# Altium PCB HAB_V01R01.PcbDoc (part 1 of 3)
Units mil, origin at the board's own origin, x right, y up, seen from the top; angles counter-clockwise.
Board outline 3149.61 x 1574.8 mil, 4 copper layers ([L1] Top Layer, [L2] GND, [L3] PWR, [L4] Bottom Layer), stack 61.811 mil thick; 74 components, 79 nets, 377 pads, 164 vias.
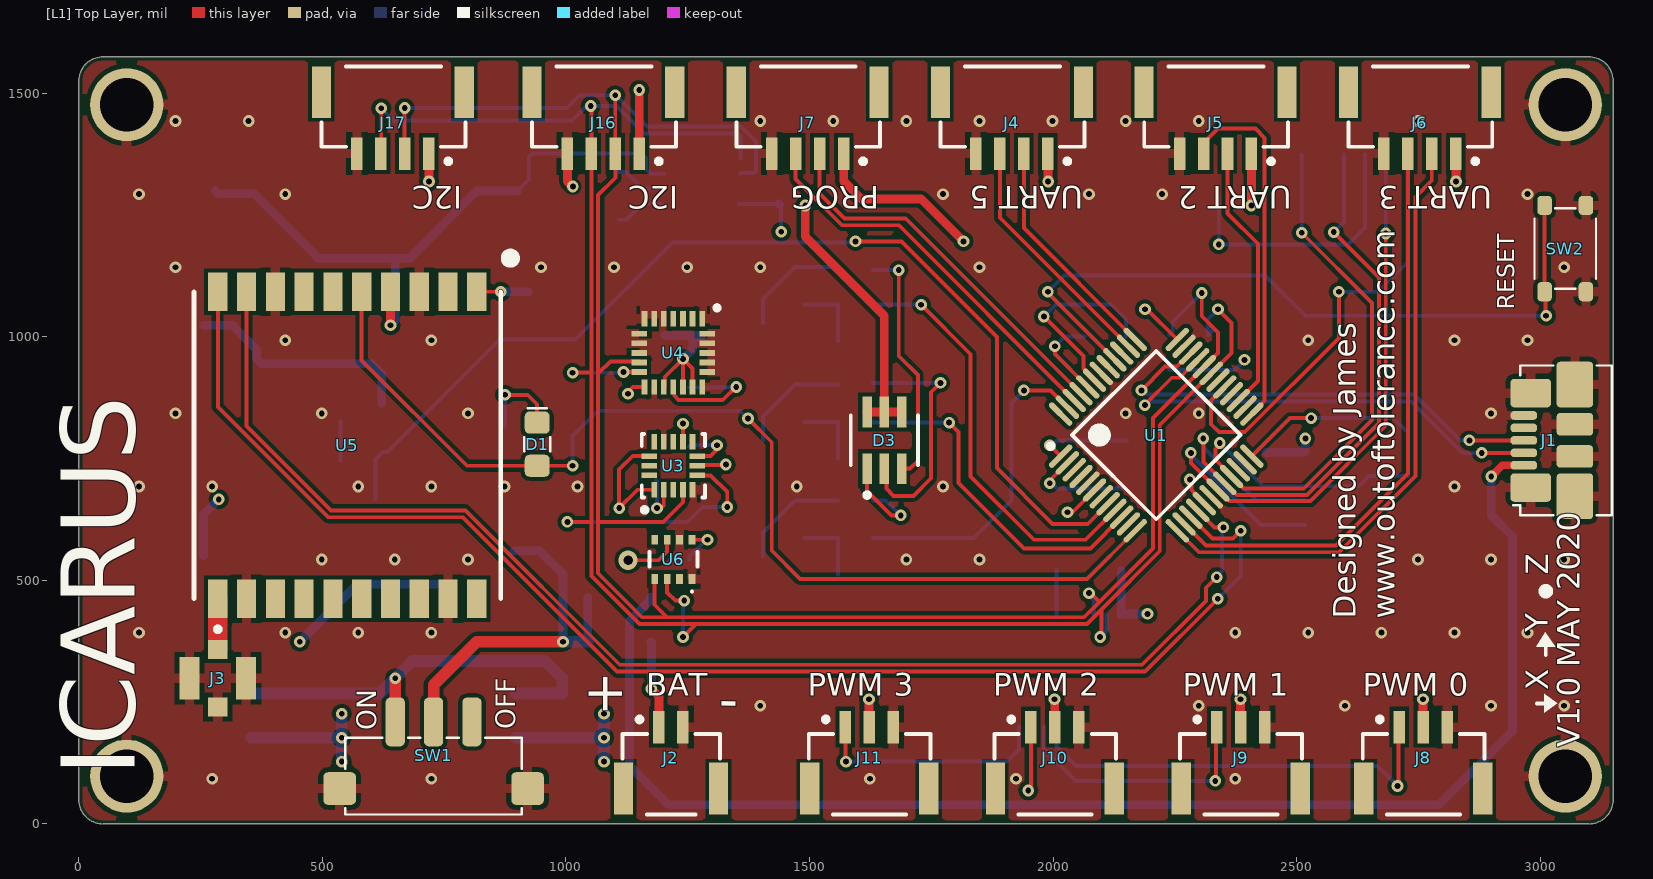
[diagram p0: [L1] Top Layer view]
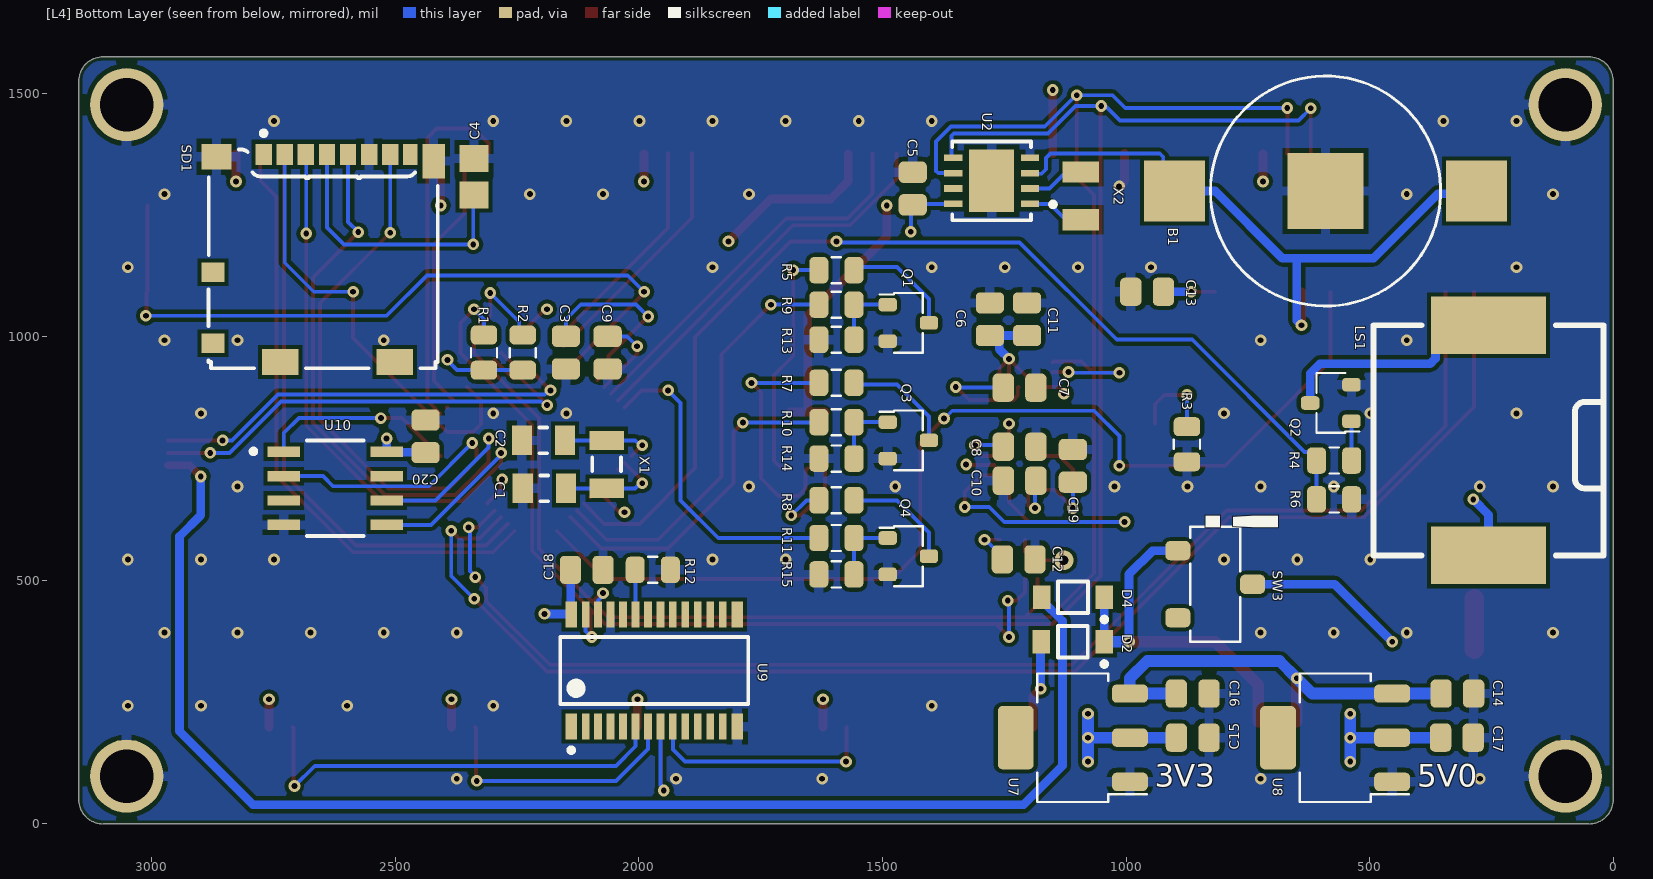
[diagram p1: [L4] Bottom Layer view, seen from below]
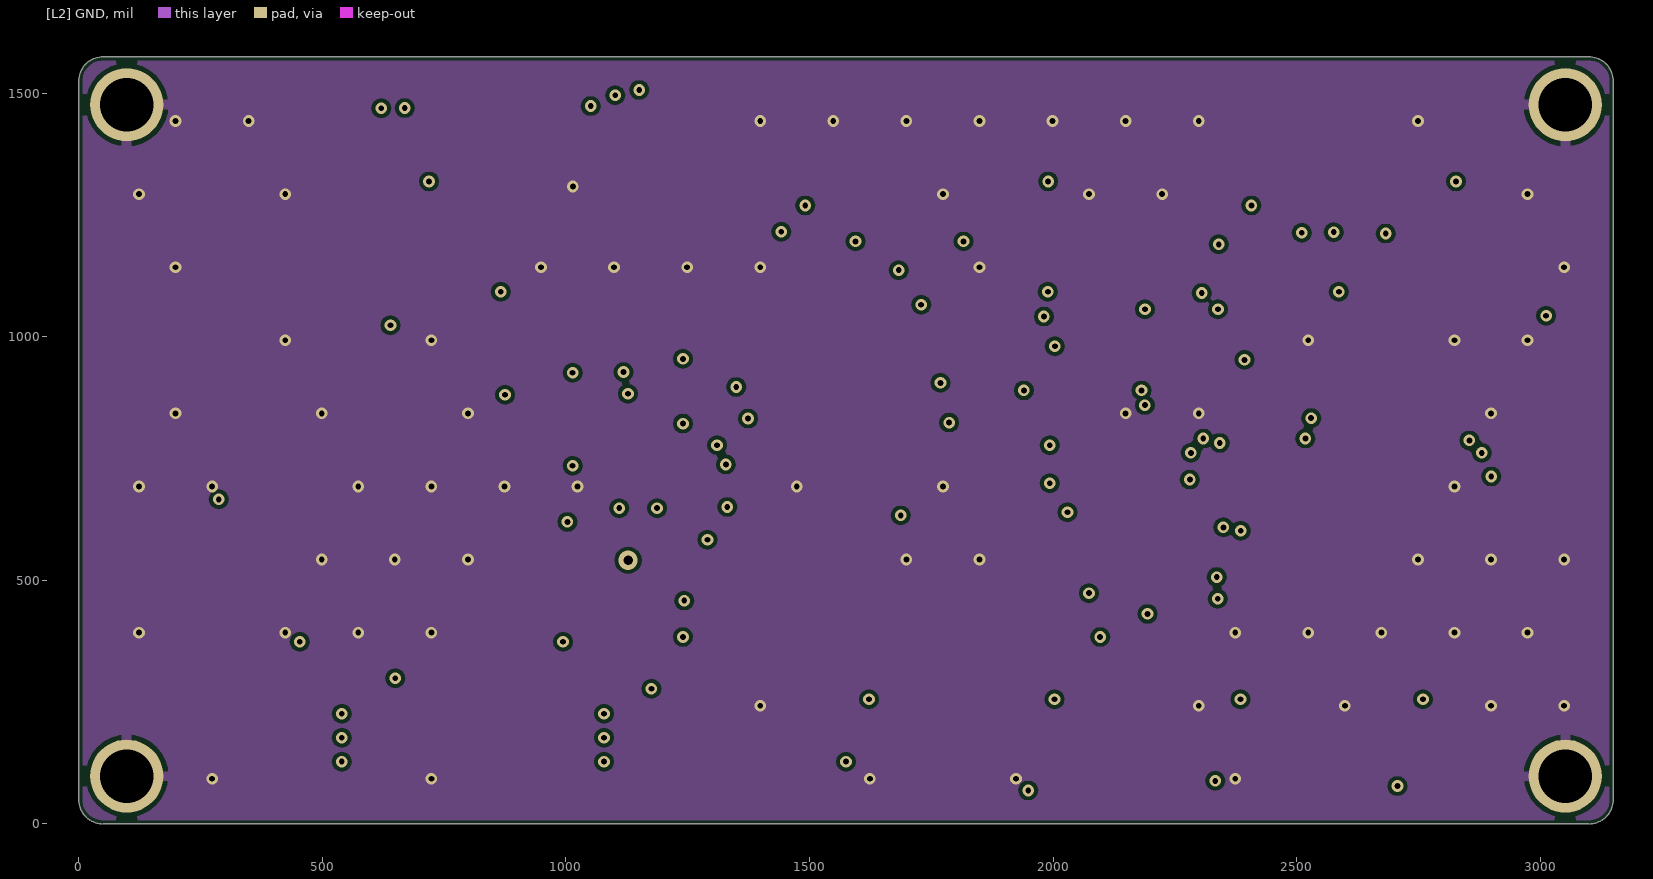
[diagram p2: [L2] GND]
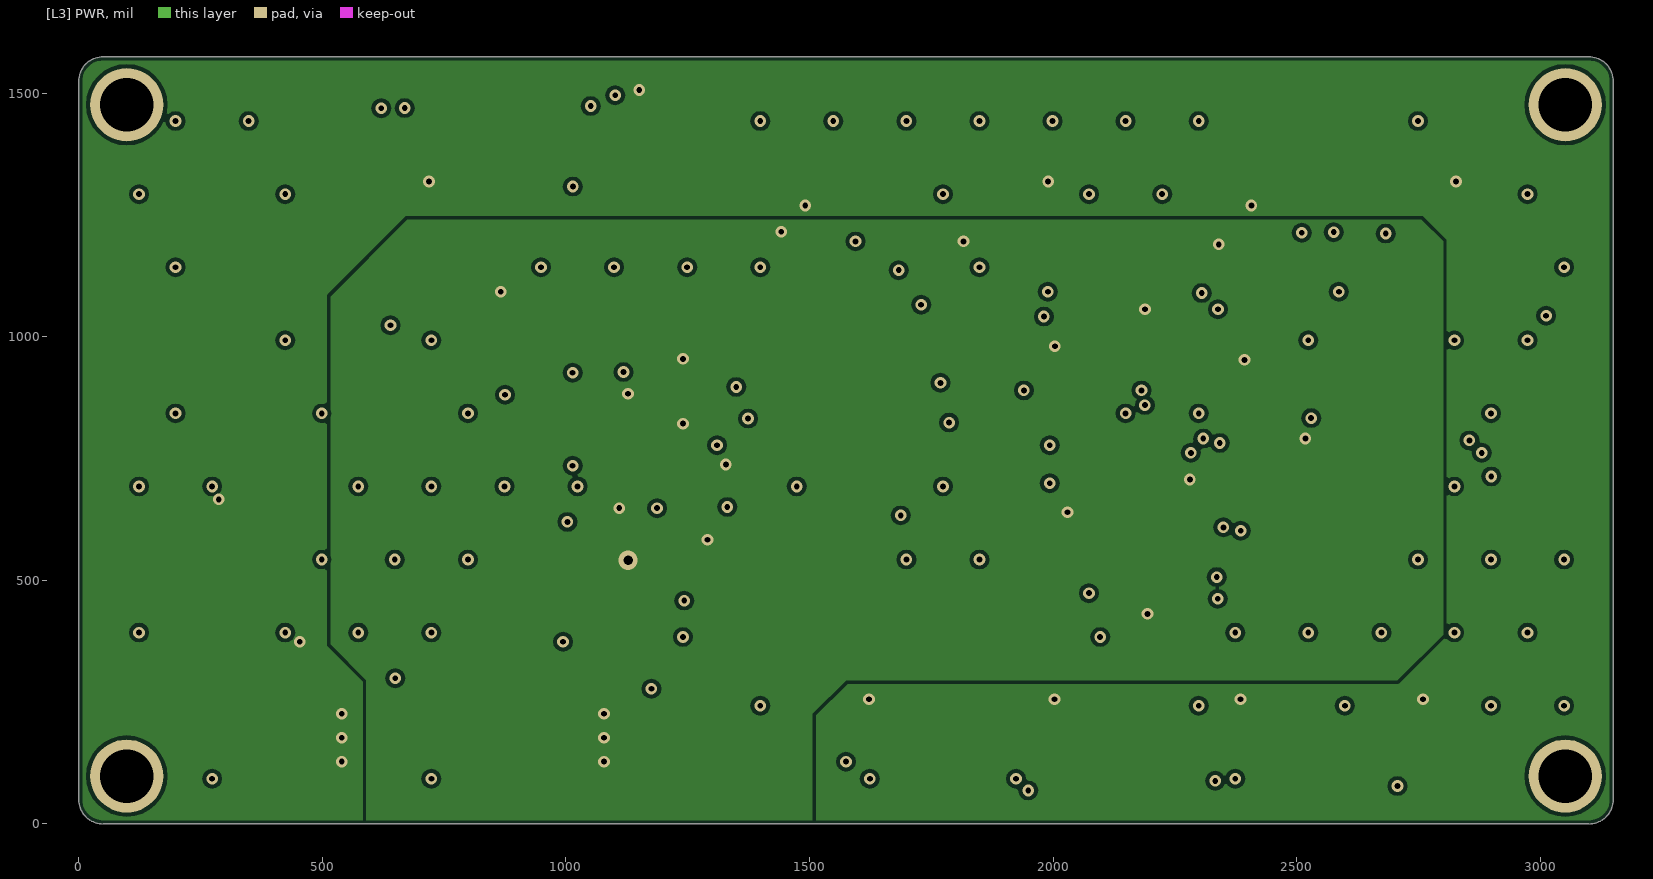
[diagram p3: [L3] PWR]
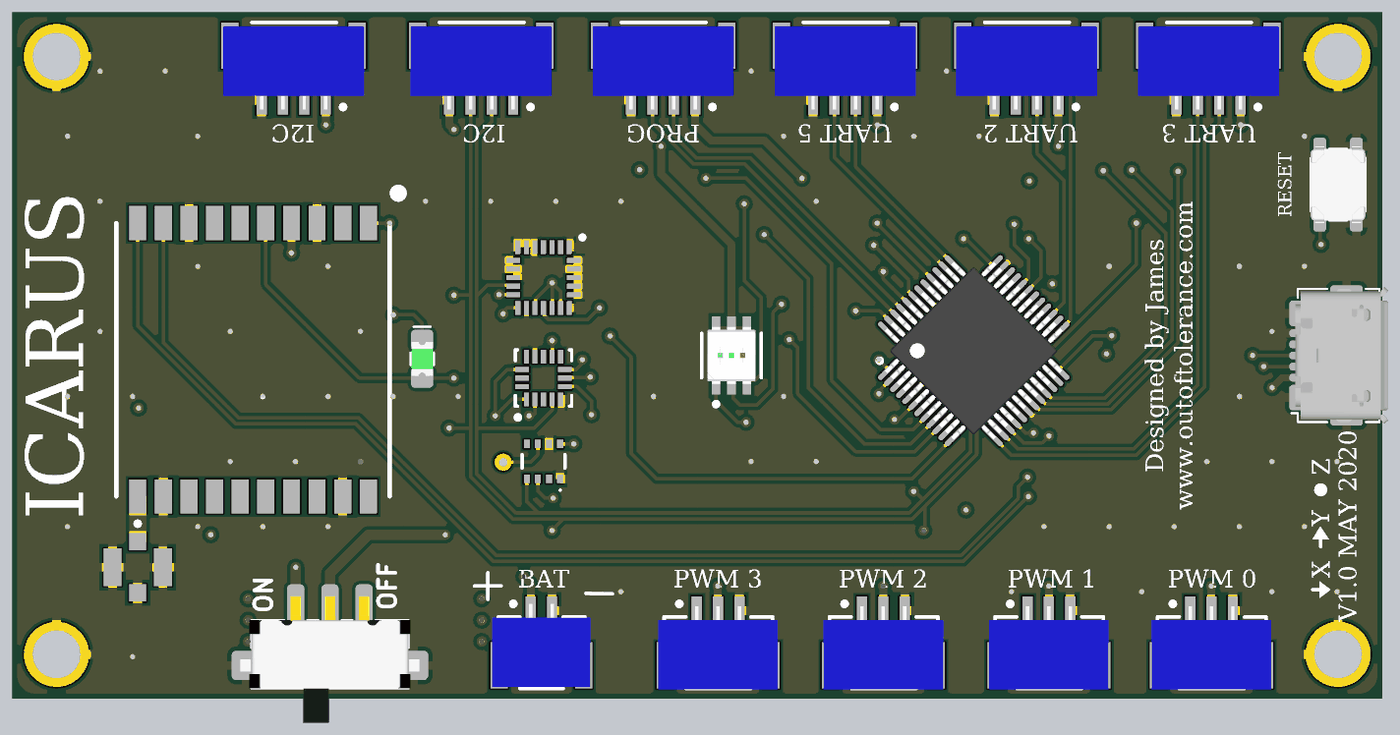
[diagram p5: 3D render of the assembled board from above, using the file's embedded part models]
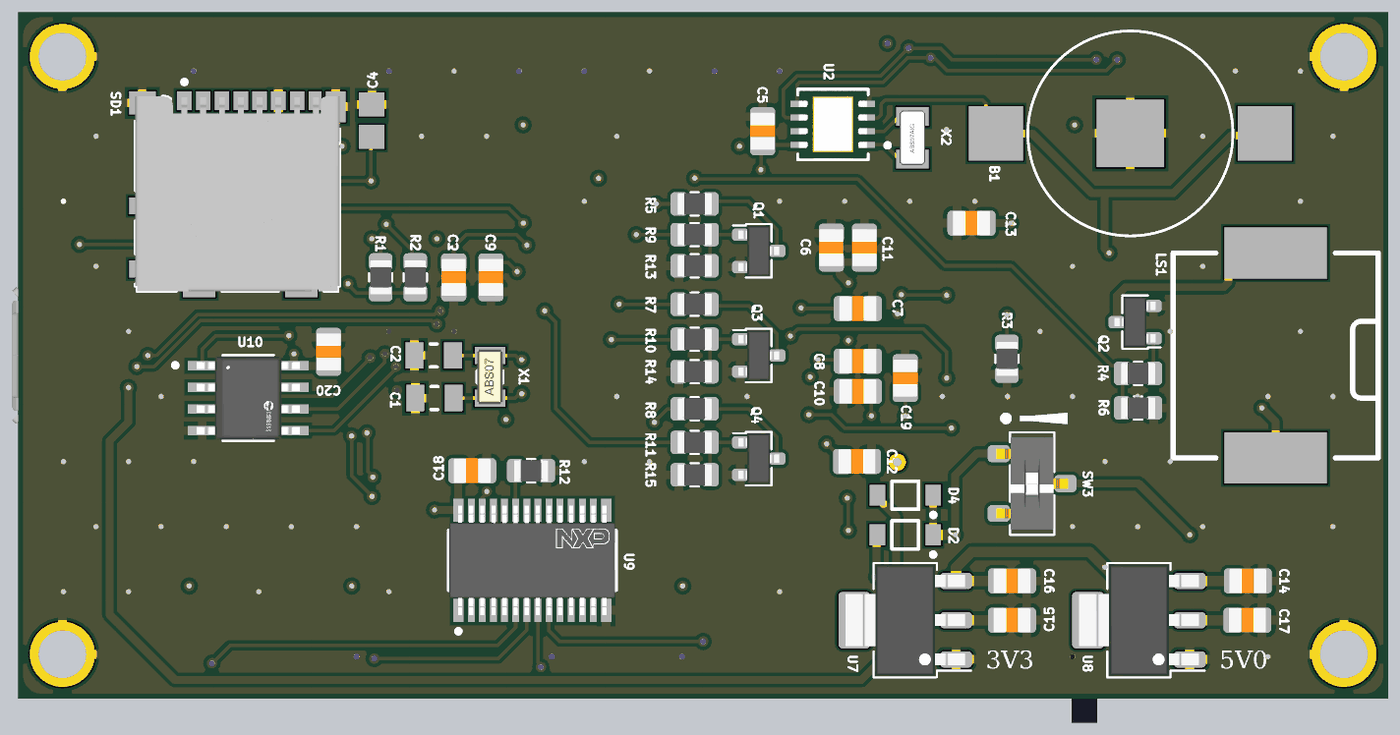
[diagram p6: 3D render of the assembled board from below, using the file's embedded part models]

## Layer stack, top to bottom
Top Solder: solder mask 1, SM-001, Dk 4
[L1] Top Layer: signal copper 1.378
Dielectric 2: prepreg 7.874, PP-017, Dk 4.3
[L2] GND: signal copper 0.689
Dielectric 3: core 41.929, Core-039, Dk 4.8
[L3] PWR: signal copper 0.689
Dielectric 4: prepreg 7.874, PP-017, Dk 4.3
[L4] Bottom Layer: signal copper 1.378
Bottom Solder: solder mask 1, SM-001, Dk 4

## Board outline
50,0 cw(c50,50) 0,50 0,1524.8 cw(c50,1524.8) 50,1574.8 3099.61,1574.8 cw(c3099.61,1524.8) 3149.61,1524.8 3149.61,50 cw(c3099.61,50) 3099.61,0

## Design rules (kind name [scope] priority, off if disabled: settings)
BoardOutlineClearance [All] p1: gap=7.87 ignorepadtopadclearanceinfootprint=FALSE except(15.75: Arc-SplitBarrior Arc-SplitContinuation Track-SplitBarrior Track-SplitContinuation SMDPad-SplitBarrior SMDPad-SplitContinuation THPad-SplitBarrior THPad-SplitContinuation Via-SplitBarrior Via-SplitContinuation Fill-SplitBarrior Fill-SplitContinuation Poly-SplitBarrior Poly-SplitContinuation Region-SplitBarrior Region-SplitContinuation Text-SplitBarrior Text-SplitContinuation)
Clearance "Clearance Bottom Layer" [OnLayer('Bottom Layer')] p1: gap=8 ignorepadtopadclearanceinfootprint=TRUE except(10: Arc-Text Track-Text SMDPad-Text THPad-Text Via-Text Fill-Text Poly-Text Region-Text Text-Text)
Clearance "Clearance Top Layer" [OnLayer('Top Layer')] p2: gap=8 ignorepadtopadclearanceinfootprint=TRUE except(10: Arc-Text Track-Text SMDPad-Text THPad-Text Via-Text Fill-Text Poly-Text Region-Text Text-Text)
Clearance [All] p3: gap=7.87 ignorepadtopadclearanceinfootprint=FALSE except(3.5: Arc-Arc Arc-Track Arc-SMDPad Track-Track Track-SMDPad SMDPad-SMDPad; 5: Arc-Via Track-Via SMDPad-Via THPad-Via Via-Via; 10: Arc-Text Track-Text SMDPad-Text THPad-Text Via-Text Fill-Text Poly-Text Region-Text Text-Text)
DiffPairsRouting [All] p1: maxlimit=10 minlimit=10 mostfreqgap=10 toplayer_minwidth=15 toplayer_maxwidth=15 toplayer_prefwidth=15 midlayer1_minwidth=15 midlayer1_maxwidth=15 midlayer1_prefwidth=15 midlayer2_minwidth=15 midlayer2_maxwidth=15 midlayer2_prefwidth=15 bottomlayer_minwidth=15 bottomlayer_maxwidth=15 bottomlayer_prefwidth=15 maxuncoupledlength=500
HoleSize [All] p1: absolutevalues=TRUE maxlimit=248.03 minlimit=7.87 maxpercent=80.000 minpercent=20.000
MinimumAnnularRing [All] p1: minimumring=3
MinimumSolderMaskSliver [All] p1: minsoldermaskwidth=3.94
PolygonConnect PolygonConnect_1 [All] p1: thpad.connectstyle=Relief thpad.reliefconductorwidth=20 thpad.reliefentries=4 thpad.polygonreliefangle="90 Angle" thpad.airgapwidth=10 smdpad.connectstyle=Relief smdpad.reliefconductorwidth=20 smdpad.reliefentries=4 smdpad.polygonreliefangle="90 Angle" smdpad.airgapwidth=10 via.connectstyle=Direct via.reliefconductorwidth=20 via.reliefentries=4 via.polygonreliefangle="90 Angle" via.airgapwidth=10
RoutingCorners [All] p1: cornerstyle=Round minsetback=100 maxsetback=100
RoutingVias [All] p1: holewidth=19.68 width=39.37 viastyle="Through Hole" minholewidth=7.87 minwidth=17.72 maxholewidth=39.37 maxwidth=78.74
SilkToSilkClearance [All] p1: silktosilkclearance=3.94
SilkToSolderMaskClearance [IsPad] p1: minsilkscreentomaskgap=3.94 clearancetoexposedcopper=TRUE
SolderMaskExpansion [All] p1: expansion=4 istentingtop=FALSE
Width [All] p1: maxlimit=100 minlimit=3.5 preferedwidth=15
24 further rules are at their usual default settings.

## Classes and differential pairs
component class "[06] Connectors": J4 J5 J6 J7 J16 J17
component class "[04] POWER": B1 C14 C15 C16 C17 D2 D4 J2 SW1 SW3 U7 U8
component class "[03] PWM DRIVER": C18 J8 J9 J10 J11 R12 U9
component class "[02] - HAB": C1 C2 C3 C4 C5 C9 C20 D3 J1 LS1 Q1 Q2 Q3 Q4 R1 R2 R4 R5 R6 R7 R8 R9 R10 R11 R13 R14 R15 SD1 SW2 U1 U2 U10 X1 X2
component class "[05] SENSORS": C6 C7 C8 C10 C11 C12 C13 C19 D1 J3 R3 U3 U4 U5 U6
differential pair MCU_USB_D: +MCU_USB_D_P -MCU_USB_D_N

## Components (designator, comment, footprint, x,y, rotation, side; value= is the part's Value field where it differs from the comment)
B1 "3000TR" 3000TR 590.55,1299.21 r180 bottom
C1 "GRM21A5C2E220JW01D" CAPC2013X100X30ML20 2193.9,688.98 r0 bottom
C2 "GRM21A5C2E220JW01D" CAPC2013X100X30ML20 2195.87,787.4 r0 bottom
C3 "1uF" "INCH 0805 - METRIC 2012 - H140" 2149.61,967.52 r90 bottom
C4 "GRM21BR71C105KA01L" CAPC2013X135X45ML10T25 2338.28,1328.74 r90 bottom
C5 "1uF" "INCH 0805 - METRIC 2012 - H140" 1437.82,1304.33 r270 bottom
C6 "1uF" "INCH 0805 - METRIC 2012 - H140" 1279.53,1036.11 r270 bottom
C7 "100nF" "INCH 0805 - METRIC 2012 - H120" 1218.5,895.6 r0 bottom
C8 "100nF" "INCH 0805 - METRIC 2012 - H120" 1218.5,774.32 r0 bottom
C9 "1uF" "INCH 0805 - METRIC 2012 - H140" 2063.98,967.52 r90 bottom
C10 "100nF" "INCH 0805 - METRIC 2012 - H120" 1218.5,704.65 r180 bottom
C11 "1uF" "INCH 0805 - METRIC 2012 - H140" 1203.23,1036.11 r270 bottom
C12 "1uF" "INCH 0805 - METRIC 2012 - H140" 1220.47,543.16 r0 bottom
C13 "1uF" "INCH 0805 - METRIC 2012 - H140" 956.69,1092.52 r180 bottom
C14 "10uF" "INCH 0805 - METRIC 2012 - H140" 319.88,267.72 r0 bottom
C15 "10uF" "INCH 0805 - METRIC 2012 - H140" 863.19,177.17 r0 bottom
C16 "10uF" "INCH 0805 - METRIC 2012 - H140" 863.19,267.72 r0 bottom
C17 "10uF" "INCH 0805 - METRIC 2012 - H140" 320.87,177.17 r0 bottom
C18 "1uF" "INCH 0805 - METRIC 2012 - H140" 2106.94,521.65 r0 bottom
C19 "1uF" "INCH 0805 - METRIC 2012 - H140" 1109.25,735.16 r270 bottom
C20 "1uF" "INCH 0805 - METRIC 2012 - H140" 2437.7,795.78 r270 bottom
D1 "APT2012EC" "LED - 0805 - GREEN" 940.94,779.61 r270 top
D2 "MBR120VLSFT1G" ONSC-SOD-123FL-2-498-01_V 1109.25,374.02 r0 bottom
D3 "ASMT-YTD7-0AA02" FP-PLCC-6-MFG 1653.54,787.4 r90 top
D4 "MBR120VLSFT1G" ONSC-SOD-123FL-2-498-01_V 1108.92,465.42 r0 bottom
J1 "0473460001" MOLEX_047346-0001 3057.09,787.4 r270 top
J2 "SM02B-GHS-TB(LF)(SN)" SM02B-GHS-TB(LF)(SN) 1190.94,19.69 r0 top
J3 "73412-0110" MOLX-73412-0110_V 285.43,299.21 r180 top
J4 "JST-GH 4 Pos" SM04B-GHS-TB(LF)(SN)- 1989.16,1555.12 r180 top
J5 "JST-GH 4 Pos" SM04B-GHS-TB(LF)(SN)- 2407.07,1555.12 r180 top
J6 "JST-GH 4 Pos" SM04B-GHS-TB(LF)(SN)- 2826.36,1555.12 r180 top
J7 "JST-GH 4 Pos" SM04B-GHS-TB(LF)(SN)- 1569.87,1555.12 r180 top
J8 "SM03B-GHS-TB(LF)(SN)" SM03B-GHS-TB(LF)(SN) 2710.38,19.69 r0 top
J9 "SM03B-GHS-TB(LF)(SN)" SM03B-GHS-TB(LF)(SN) 2335.76,19.69 r0 top
J10 "SM03B-GHS-TB(LF)(SN)" SM03B-GHS-TB(LF)(SN) 1954.25,19.69 r0 top
J11 "SM03B-GHS-TB(LF)(SN)" SM03B-GHS-TB(LF)(SN) 1573.32,19.69 r0 top
J16 "JST-GH 4 Pos" SM04B-GHS-TB(LF)(SN)- 1150.59,1555.12 r180 top
J17 "JST-GH 4 Pos" SM04B-GHS-TB(LF)(SN)- 718.5,1555.12 r180 top
LS1 "CMT-1203-SMT-TR" CMT-1203-SMT-TR 255.91,787.4 r0 bottom
Q1 "BSS138" SOT95P240X120-3 1446.85,1028.54 r270 bottom
Q2 "AO3414" SOT95P240X120-3 579.72,864.17 r90 bottom
Q3 "BSS138" SOT95P240X120-3 1446.85,787.4 r270 bottom
Q4 "BSS138" SOT95P240X120-3 1446.85,549.64 r270 bottom
R1 "10kR" "INCH 0805 - METRIC 2012 - H070" 2317.91,967.52 r270 bottom
R2 "10kR" "INCH 0805 - METRIC 2012 - H070" 2238.19,967.52 r270 bottom
R3 "100R" "INCH 0805 - METRIC 2012 - H070" 875,779.53 r90 bottom
R4 "100R" "INCH 0805 - METRIC 2012 - H070" 572.83,746.06 r180 bottom
R5 "100R" "INCH 0805 - METRIC 2012 - H070" 1594.49,1136.81 r0 bottom
R6 "1MR" "INCH 0805 - METRIC 2012 - H070" 572.83,666.34 r0 bottom
R7 "100R" "INCH 0805 - METRIC 2012 - H070" 1594.49,905.51 r0 bottom
R8 "100R" "INCH 0805 - METRIC 2012 - H070" 1594.49,664.37 r0 bottom
R9 "100R" "INCH 0805 - METRIC 2012 - H070" 1594.49,1065.94 r0 bottom
R10 "100R" "INCH 0805 - METRIC 2012 - H070" 1594.49,824.8 r0 bottom
R11 "100R" "INCH 0805 - METRIC 2012 - H070" 1594.49,587.04 r0 bottom
R12 "10kR" "INCH 0805 - METRIC 2012 - H070" 1971.4,521.65 r180 bottom
R13 "1MR" "INCH 0805 - METRIC 2012 - H070" 1594.49,994.09 r180 bottom
R14 "1MR" "INCH 0805 - METRIC 2012 - H070" 1594.49,750 r180 bottom
R15 "1MR" "INCH 0805 - METRIC 2012 - H070" 1594.49,512.24 r180 bottom
SD1 "104031-0811" MOLX-104031-0811_V 2647.64,1161.42 r0 bottom
SW1 "SS312SAH4-R" NKK_SS312SAH4 728.35,98.43 r180 top
SW2 "TL3365AF180QG" ESWITCH_TL3365AF180QG 3051.18,1181.1 r270 top
SW3 "CJS-1200TB" NCE_CJS-1200TB 816.93,492.13 r270 bottom
U1 "ATSAMD21G18A-AU" ATML-TQFP48_M 2211.61,798.23 r45 top
U2 "PCF8523TK/1,118" FP-SOT909-1-MFG 1275.87,1320.07 r0 bottom
U3 "FXOS8700CQR1" FREE-QFN-16-3000X3000DE_V 1220.47,735.31 r90 top
U4 "FXAS21002CQR1" FXAS21002CQR1 1220.47,966.97 r270 top
U5 "MTK3339" MTK3339 551.18,777.56 r270 top
U6 "BME280" BOSC-BME280-8_V 1220.47,543.16 r270 top
U7 "NCP1117ST33T3G" SOT223-4P230_700X180L90X70 1109.25,177.17 r90 bottom
U8 "NCP1117ST50T3G" SOT223-4P230_700X180L90X70 570.87,177.17 r90 bottom
U9 "PCA9685PW,118" FP-SOT361-1-MFG 1968.5,314.96 r90 bottom
U10 "FM25W256-GTR" FP-51-85066-MFG 2623.03,688.98 r180 bottom
X1 "ABS07-120-32.768KHZ-T" ABRA-ABS07_A_V 2065.94,738.19 r90 bottom
X2 "ABS07-32.768KHZ-7-T" ABS07 1092.52,1289.37 r90 bottom

## Footprints (in the part's own frame and the unit in brackets; to place one, negate y for a bottom-side part, rotate by r counter-clockwise, add the part's x,y. Pads: shape width x height; smd on the part's side, far side on the other; paste and mask are expansions set on the pad)
3000TR [mm] "12mm Coin Cell Holder Surface Mount"
  rect 3.18x3.18 smd: 1(-7.87,0) 1(7.87,0)
  rect 3.96x3.96 smd: 2(0,0)
  silkscreen extent -6,-6 6,6, body extent -6.5,-6 6.5,6.01, height 3.18
ABRA-ABS07_A_V [mm] "SMD, 2-Leads, Body 3.2x1.5mm"
  rect 1x1.8 smd: 1(-1.25,0) 2(1.25,0)
  silkscreen extent -0.35,-0.75 0.35,0.75, body extent -1.6,-0.75 1.6,0.75, height 0.9
ABS07 [mm]
  rect 1.1x1.9 smd: 1(-1.25,0) 2(1.25,0)
  body extent -1.6,-0.75 1.6,0.75, height 0.9
ATML-TQFP48_M [mm] "QFP, 48-Leads, Body 7x7mm, Pitch 0.5mm, IPC Low Density"
  oval 1.6x0.3 smd: 1(-4.3,2.75) 2(-4.3,2.25) 3(-4.3,1.75) 4(-4.3,1.25) 5(-4.3,0.75) 6(-4.3,0.25) 7(-4.3,-0.25) 8(-4.3,-0.75) 9(-4.3,-1.25) 10(-4.3,-1.75) 11(-4.3,-2.25) 12(-4.3,-2.75) 25(4.3,-2.75) 26(4.3,-2.25) 27(4.3,-1.75) 28(4.3,-1.25) 29(4.3,-0.75) 30(4.3,-0.25) 31(4.3,0.25) 32(4.3,0.75) 33(4.3,1.25) 34(4.3,1.75) 35(4.3,2.25) 36(4.3,2.75)
  oval 0.3x1.6 smd: 13(-2.75,-4.3) 14(-2.25,-4.3) 15(-1.75,-4.3) 16(-1.25,-4.3) 17(-0.75,-4.3) 18(-0.25,-4.3) 19(0.25,-4.3) 20(0.75,-4.3) 21(1.25,-4.3) 22(1.75,-4.3) 23(2.25,-4.3) 24(2.75,-4.3) 37(2.75,4.3) 38(2.25,4.3) 39(1.75,4.3) 40(1.25,4.3) 41(0.75,4.3) 42(0.25,4.3) 43(-0.25,4.3) 44(-0.75,4.3) 45(-1.25,4.3) 46(-1.75,4.3) 47(-2.25,4.3) 48(-2.75,4.3)
  silkscreen extent -4.42,-3.1 3.1,3.6, body extent -4.5,-4.5 4.5,4.5, height 1.2
BOSC-BME280-8_V [mm] "SMD, 8-Leads, Body 2.5x2.5mm, Pitch 0.65mm"
  rect 0.5x0.35 smd: 1(1.025,0.975) 2(1.025,0.325) 3(1.025,-0.325) 4(1.025,-0.975) 5(-1.025,-0.975) 6(-1.025,-0.325) 7(-1.025,0.325) 8(-1.025,0.975)
  silkscreen extent -0.39,-1.25 1.72,1.25, body extent -1.25,-1.25 1.25,1.25, height 1
CAPC2013X100X30ML20 [mm] "Chip Capacitor, 2-Leads, Body 2.00x1.25mm, IPC Low Density"
  rect 1.05x1.55 smd: 1(-1.125,0) 2(1.125,0)
  silkscreen extent -0.2,-0.67 0.2,0.67, body extent -1.1,-0.73 1.1,0.73, height 1
CAPC2013X135X45ML10T25 [mm] "Chip Capacitor, 2-Leads, Body 2.10x1.35mm, IPC Low Density"
  rect 1.4x1.5 smd: 1(-0.95,0) 2(0.95,0)
  body extent -1.05,-0.67 1.05,0.67, height 1.35
CMT-1203-SMT-TR [mm] "AUDIO PIEZO TRANSDUCER 5V NOM 25V MAX SMD"
  rect 6x3 smd: 1(0,6) 2(0,-6)
  silkscreen extent -6,-6 6,6, body extent -6,-6 6,6, height 3
ESWITCH_TL3365AF180QG [mm] "Switch, Tactile; 4 pin, 4.20 mm L X 3.20 mm W X 1.55 mm H body"
  rrect51% 1x0.75 smd paste+0 mask+0: 1(-2.25,-1.075) 2(2.25,-1.075) 3(-2.25,1.075) 4(2.25,1.075)
  silkscreen extent -2.1,-1.6 2.1,1.6, body extent -2.25,-1.6 2.25,1.6, height 2.5
FP-51-85066-MFG [mm]
  rect 1.685x0.542 smd paste+0 mask+0: 1(-2.686,1.905) 2(-2.686,0.635) 3(-2.686,-0.635) 4(-2.686,-1.905) 5(2.686,-1.905) 6(2.686,-0.635) 7(2.686,0.635) 8(2.686,1.905)
  silkscreen extent -4.39,-2.49 1.47,2.49, body extent -3.01,-2.44 3.01,2.44, height 1.73
FP-PLCC-6-MFG [mm]
  rect 1.6x0.5 smd paste+0 mask+0: 1(-1.475,0.9) 2(-1.475,0) 3(-1.475,-0.9) 4(1.475,-0.9) 5(1.475,0) 6(1.475,0.9)
  silkscreen extent -2.97,-1.75 1.3,1.75, body extent -2.37,-1.6 2.37,1.6, height 0.25
FP-SOT361-1-MFG [mm]
  rect 1.35x0.6 smd paste+0 mask+0: 1(-2.925,4.325) 14(-2.925,-4.325) 15(2.925,-4.325) 28(2.925,4.325)
  rect 1.35x0.4 smd paste+0 mask+0: 2(-2.925,3.575) 3(-2.925,2.925) 4(-2.925,2.275) 5(-2.925,1.625) 6(-2.925,0.975) 7(-2.925,0.325) 8(-2.925,-0.325) 9(-2.925,-0.975) 10(-2.925,-1.625) 11(-2.925,-2.275) 12(-2.925,-2.925) 13(-2.925,-3.575) 16(2.925,-3.575) 17(2.925,-2.925) 18(2.925,-2.275) 19(2.925,-1.625) 20(2.925,-0.975) 21(2.925,-0.325) 22(2.925,0.325) 23(2.925,0.975) 24(2.925,1.625) 25(2.925,2.275) 26(2.925,2.925) 27(2.925,3.575)
  silkscreen extent -4.27,-4.9 1.75,4.9, body extent -3.2,-4.85 3.2,4.85, height 1.1
FP-SOT909-1-MFG [mm]
  rect 0.95x0.35 smd paste+0 mask+0: 1(-2,1.2) 2(-2,0.4) 3(-2,-0.4) 4(-2,-1.2) 5(2,-1.2) 6(2,-0.4) 7(2,0.4) 8(2,1.2)
  rect 2.35x3.25 smd paste-1000 mask+0: 9(0,0)
  silkscreen extent -3.32,-2.05 2.05,2.05, body extent -2,-2 2,2, height 1
FREE-QFN-16-3000X3000DE_V [mm] "QFN, 16-Leads, Body 3.00x3.00mm, Pitch 0.50mm"
  rect 0.8x0.3 smd: 1(-1.25,1) 2(-1.25,0.5) 3(-1.25,0) 4(-1.25,-0.5) 5(-1.25,-1) 9(1.25,-1) 10(1.25,-0.5) 11(1.25,0) 12(1.25,0.5) 13(1.25,1)
  rect 0.3x0.8 smd: 6(-0.5,-1.25) 7(0,-1.25) 8(0.5,-1.25) 14(0.5,1.25) 15(0,1.25) 16(-0.5,1.25)
  silkscreen extent -2.42,-1.65 1.65,1.65, body extent -1.5,-1.5 1.5,1.5, height 1.25
FXAS21002CQR1 [mm]
  rect 0.8x0.3 smd: 1(-1.775,1.5) 2(-1.775,1) 3(-1.775,0.5) 4(-1.775,0) 5(-1.775,-0.5) 6(-1.775,-1) 7(-1.775,-1.5) 13(1.775,-1.5) 14(1.775,-1) 15(1.775,-0.5) 16(1.775,0) 17(1.775,0.5) 18(1.775,1) 19(1.775,1.5)
  rect 0.3x0.8 smd: 8(-1,-1.775) 9(-0.5,-1.775) 10(0,-1.775) 11(0.5,-1.775) 12(1,-1.775) 20(1,1.775) 21(0.5,1.775) 22(0,1.775) 23(-0.5,1.775) 24(-1,1.775)
  silkscreen extent -2.46,2.16 -2.24,2.39, body extent -2,-2 2,1.96, height 1.05
"INCH 0805 - METRIC 2012 - H070" [mm] "Resistor, Chip; 2.00 mm L X 1.25 mm W X 0.70 mm H body"
  rrect51% 0.99x1.38 smd paste+0 mask+0: 1(-0.915,0) 2(0.915,0)
  silkscreen extent -0.24,-0.68 0.24,0.68, body extent -1,-0.63 1,0.62, height 0.7
"INCH 0805 - METRIC 2012 - H120" [mm] "Capacitor, Chip; 2.00 mm L X 1.25 mm W X 1.20 mm H body"
  rrect45% 1.11x1.47 smd paste+0 mask+0: 1(-0.85,0) 2(0.85,0)
  body extent -1.1,-0.72 1.1,0.72, height 1.2
"INCH 0805 - METRIC 2012 - H140" [mm] "Capacitor, Chip; 2.00 mm L X 1.25 mm W X 1.40 mm H body"
  rrect45% 1.11x1.47 smd paste+0 mask+0: 1(-0.85,0) 2(0.85,0)
  body extent -1.1,-0.72 1.1,0.72, height 1.4
"LED - 0805 - GREEN" [mm] "LED, Side Lead; 2 pin, 1.25 mm L X 2.00 mm W X 0.80 mm H body"
  rrect43% 1.15x1.3 smd paste+0 mask+0: A(1.125,0) C(-1.125,0)
  silkscreen extent -1.88,-0.68 0.37,0.68, body extent -1,-0.63 1,0.63, height 0.8
MOLEX_047346-0001 [mm] "Connector, USB Receptacle Right Angle; 11 pin, 7.80 mm L X 5.00 mm W X 2.94 mm H body"
  rrect19% 2.375x1.9 smd paste+0 mask+0: 0(-2.913,0.35) 0(2.913,0.35)
  rrect24% 1.475x2.1 smd paste+0 mask+0: 0(-2.463,-1.95) 0(2.463,-1.95)
  rrect31% 1.175x1.9 smd paste+0 mask+0: 0(-0.838,0.35) 0(0.838,0.35)
  rrect80% 0.45x1.38 smd paste+0 mask+0: 1(1.3,-2.31) 2(0.65,-2.31) 3(0,-2.31) 4(-0.65,-2.31) 5(-1.3,-2.31)
  silkscreen extent -3.9,-2.88 3.9,2.27, body extent -3.99,-2.65 3.99,2.78, height 2.74
MOLX-73412-0110_V [mm] "MCRF, 4-Leads, Body 2.6x2.6mm"
  rect 1x1 smd: 1(0,-1.5) 3(0,1.5)
  rect 1.05x2.2 smd: 2(-1.475,0) 4(1.475,0)
  silkscreen extent -0.13,-2.67 0.12,-2.43, body extent -1.3,-1.3 1.3,1.3, height 1.3
MOLX-104031-0811_V [mm] "Micro SD, 8-Leads, Body 11.95x11.4mm, Pitch 1.1mm"
  rect 0.85x1.1 smd: 1(3.113,-5.412) 2(2.013,-5.412) 3(0.913,-5.412) 4(-0.188,-5.412) 5(-1.288,-5.412) 6(-2.387,-5.412) 7(-3.487,-5.412)
  rect 0.75x1.1 smd: 8(-4.537,-5.412)
  rect 1.2x1 smd: 9(5.748,0.738) 10(5.748,4.438)
  rect 1.55x1.35 smd: 11(5.573,-5.287)
  rect 1.17x1.8 smd: 12(-5.747,-5.062)
  rect 1.9x1.35 smd: 13(-3.722,5.413) 14(2.248,5.413)
  silkscreen extent -5.97,-6.64 5.98,5.74, body extent -5.97,-5.66 5.98,5.74, height 1.45
MTK3339 [mm] "Ultimate GPS Module 66 channel 10 Hz"
  rect 2x1 smd: 1(-8,6.75) 2(-8,5.25) 3(-8,3.75) 4(-8,2.25) 5(-8,0.75) 6(-8,-0.75) 7(-8,-2.25) 8(-8,-3.75) 9(-8,-5.25) 10(-8,-6.75) 11(8,-6.75) 12(8,-5.25) 13(8,-3.75) 14(8,-2.25) 15(8,-0.75) 16(8,0.75) 17(8,2.25) 18(8,3.75) 19(8,5.25) 20(8,6.75)
  silkscreen extent -10,-8 8,8.75, body extent -8,-8 8,8, height 5.2
NCE_CJS-1200TB [mm] "Switch, Slide; 3 pin, 6.00 mm L X 2.60 mm W X 0.00 mm H body"
  rrect50% 1x1.3 smd paste+0 mask+0: 1(-1.75,-1.95) 2(0,1.95) 3(1.75,-1.95)
  silkscreen extent -3,-1.3 3,1.3, body extent -2.7,-2.1 2.7,2.1, height 2.52
NKK_SS312SAH4 [mm] "Switch, Slide; 5 pin, 9.20 mm L X 4.00 mm W X 0.00 mm H body"
  rrect29% 1.7x1.7 smd paste+0 mask+0: 0(-4.9,0.65) 0(4.9,0.65)
  rrect50% 1x2.55 smd paste+0 mask+0: 1(-2,-2.825) 2(0,-2.825) 3(2,-2.825)
  silkscreen extent -4.6,-2 4.6,2, body extent -5.25,-3.39 5.25,4, height 3.05
ONSC-SOD-123FL-2-498-01_V [mm] "SOD, 2-Leads, Body 2.7x1.65mm"
  rect 0.91x1.22 smd: 1(-1.635,0) 2(1.635,0)
  silkscreen extent -1.76,-0.82 0.78,1.28, body extent -1.35,-0.82 1.35,0.82, height 1
SM02B-GHS-TB(LF)(SN) [mm] "JST-GH 2 POS RIGHT ANGLE"
  rect 0.6x1.7 smd: 1(0,4.55) 2(1.25,4.55)
  rect 1x2.7 smd: M(-1.85,1.35) M(3.1,1.35)
  silkscreen extent -1.91,0 3.17,5.08, body extent -2.25,0.1 3.5,4.95, height 4.35
SM03B-GHS-TB(LF)(SN) [mm] "JST-GH 3 POS RIGHT ANGLE"
  rect 0.6x1.7 smd: 1(0,4.55) 2(1.25,4.55) 3(2.5,4.55)
  rect 1x2.7 smd: M(-1.85,1.35) M(4.35,1.35)
  silkscreen extent -1.91,0 4.44,5.08, body extent -2.25,-0.05 4.75,4.8, height 4.35
SM04B-GHS-TB(LF)(SN)- [mm] "JST-GH 4 POS RIGHT ANGLE"
  rect 0.6x1.7 smd: 1(0,4.55) 2(1.25,4.55) 3(2.5,4.55) 4(3.75,4.55)
  rect 1x2.7 smd: M(-1.85,1.35) M(5.6,1.35)
  silkscreen extent -1.91,0 5.59,5.08, body extent -2.25,0.25 6,5.1, height 4.35
SOT95P240X120-3 [mm] "Small Outline Transistor (SOT23), 0.95 mm pitch; 3 pin, 2.92 mm L X 1.325 mm W X 1.20 mm H body"
  rrect51% 0.71x0.96 smd paste+0 mask+0: 1(-0.95,-1.075) 2(0.95,-1.075) 3(0,1.075)
  silkscreen extent -1.56,-1.5 1.56,0.75, body extent -1.46,-1.2 1.46,1.2, height 1.2
SOT223-4P230_700X180L90X70 [mm] "Small Outline Transistor (SOT223), 2.30 mm pitch; 4 pin, 6.50 mm L X 3.50 mm W X 1.80 mm H body"
  rrect51% 0.95x1.87 smd: 1(-2.3,-2.975) 2(0,-2.975) 3(2.3,-2.975)
  rrect26% 3.3x1.87 smd: 4(0,2.975)
  silkscreen extent -3.35,-3.85 3.35,1.85, body extent -3.25,-3.5 3.25,3.5, height 1.8

## Part data
B1: "HOLDER BATTERY COIN 12MM DIA SMD", Case/Package=SMD/SMT, Color=Silver, Manufacturer="Keystone Electronics", Package Quantity=1, Supplier Part Number 1=36-3000CT-ND, Category="Power Management ICs", ComponentLink1Description=https://datasheet.ciiva.com/3/3000-3936.pdf?src-supplier=Digi-Key, ComponentLink1URL=https://datasheet.ciiva.com/3/3000-3936.pdf?src-supplier=Digi-Key, ComponentLink2Description=https://datasheet.ciiva.com/3/3000tr-3935.pdf?src-supplier=Digi-Key, ComponentLink2URL=https://datasheet.ciiva.com/3/3000tr-3935.pdf?src-supplier=Digi-Key, ComponentLink3Description=https://datasheet.ciiva.com/16305/m60-2p7-16305915.pdf?src-supplier=Future+Electronics, ComponentLink3URL=https://datasheet.ciiva.com/16305/m60-2p7-16305915.pdf?src-supplier=Future+Electronics, ComponentLink4Description=https://datasheet.ciiva.com/3/3000tr-3937.pdf?src-supplier=Digi-Key, ComponentLink4URL=https://datasheet.ciiva.com/3/3000tr-3937.pdf?src-supplier=Digi-Key, Connector Type=SMD/SMT, Diameter=12mm, Lead Free="Lead Free", Manufacturer Part Number=3000TR, Material=Bronze, Mount="Surface Mount,PCB", Number of Batteries=1, Number of Cells=1, Packaging="Tape and Reel", Pricing 1="1=0.91000, 25=0.79880, 100=0.63390, 250=0.58356, 500=0.54802 (USD)", RoHS=Yes, Stock 1=23941, Supplier 1=Digi-Key, Termination=SMD/SMT
C1 C2: library part CMP-2007-03977-1, Manufacturer=Murata, Part Number=GRM21A5C2E220JW01D
C3 C5 C6 C9 C11 C12 C13 C18 C19 C20: library part GCM21BR71E105KA56L, "CAP SMD 1uF 25V 10% 0805", Case Code (Imperial)=0805, Case Code (Metric)=2012, Dielectric=X7R, Manufacturer=Murata, Max Operating Temperature=125°C, Min Operating Temperature=-55°C, Package Quantity=3000, Ratings=AEC-Q200, Supplier Part Number 1=490-4785-1-ND, Tolerance=10%, Voltage=25V, Capacitance=1uF, Case/Package=0805, Category="Ceramic Capacitors", ComponentLink1Description=https://datasheet.ciiva.com/3778/359gcm21br71e105ka5623-3778560.pdf?src-supplier=Arrow, ComponentLink1URL=https://datasheet.ciiva.com/3778/359gcm21br71e105ka5623-3778560.pdf?src-supplier=Arrow, ComponentLink2Description=https://datasheet.ciiva.com/16624/product-16624576.pdf?src-supplier=Avnet+Europe, ComponentLink2URL=https://datasheet.ciiva.com/16624/product-16624576.pdf?src-supplier=Avnet+Europe, ComponentLink3Description=https://datasheet.ciiva.com/18183/getdatasheetpartid-153106-18183696.pdf?src-supplier=Verical, ComponentLink3URL=https://datasheet.ciiva.com/18183/getdatasheetpartid-153106-18183696.pdf?src-supplier=Verical, ComponentLink4Description=https://datasheet.ciiva.com/11789/0900766b80ef92d0-11789092.pdf?src-supplier=RSComponents, ComponentLink4URL=https://datasheet.ciiva.com/11789/0900766b80ef92d0-11789092.pdf?src-supplier=RSComponents, ComponentLink5Description=https://datasheet.ciiva.com/137/product-137199.pdf?src-supplier=Digi-Key, ComponentLink5URL=https://datasheet.ciiva.com/137/product-137199.pdf?src-supplier=Digi-Key, ComponentLink6Description=https://datasheet.ciiva.com/137/product-137200.pdf?src-supplier=Digi-Key, ComponentLink6URL=https://datasheet.ciiva.com/137/product-137200.pdf?src-supplier=Digi-Key, ComponentLink7Description=https://datasheet.ciiva.com/137/product-137201.pdf?src-supplier=Digi-Key, ComponentLink7URL=https://datasheet.ciiva.com/137/product-137201.pdf?src-supplier=Digi-Key, ComponentLink8Description=https://datasheet.ciiva.com/2989/product-2989245.pdf?src-supplier=Avnet, ComponentLink8URL=https://datasheet.ciiva.com/2989/product-2989245.pdf?src-supplier=Avnet, ComponentLink9Description=https://datasheet.ciiva.com/2989/product-2989246.pdf?src-supplier=Avnet, ComponentLink9URL=https://datasheet.ciiva.com/2989/product-2989246.pdf?src-supplier=Avnet, Depth=1.25mm, Height=1.25mm, Lead Free="Lead Free", Length=2mm, Manufacturer Part Number=GCM21BR71E105KA56L, Mount="Surface Mount", Packaging="Tape and Reel", Pricing 1="1=0.33000, 10=0.22500, 100=0.12760, 500=0.09004, 1000=0.07878 (USD)", Radiation Hardening=No, REACH SVHC="No SVHC", RoHS=Yes, Stock 1=1572955, Supplier 1=Digi-Key, Termination=SMD/SMT, Thickness=0.055inch, Voltage Rating=25V, Voltage Rating (DC)=25V, Width=0.049inch
C4: library part CMP-2000-04946-1, "Multilayer Ceramic Capacitor, 1 uF, +/- 10%, 16 V, -55 to 125 degC, 0805 (2012 Metric), RoHS, Tape and Reel", Capacitance=1µF, Case Size/Dimension=0805, Dielectric=X7R, Manufacturer=Murata, Package Description="2-Pin Surface Mount Device, Body 2 x 1.25 mm", Package Reference=805, Rated Voltage=16V, Tolerance (%)=±10%, Datasheet URL=https://datasheet.ciiva.com/34302/1858922-34302874.pdf, Datasheet Version=Mar-08, Manufacturer URL=http://www.murata.com/
C7 C8 C10: library part C0805C104K1RACTU, "CAP CER 0.1UF 100V X7R 0805", Case Code (Imperial)=0805, Case Code (Metric)=2012, Dielectric=X7R, Dielectric Material=Ceramic, Manufacturer=KEMET, Max Operating Temperature=125°C, Min Operating Temperature=-55°C, Package Quantity=1, Supplier Part Number 1=399-3486-1-ND, Tolerance=10%, Voltage=100V, Capacitance=100nF, Case/Package=0805, Category=Capacitor, ComponentLink1Description=https://datasheet.ciiva.com/7842/1776102-7842535.pdf, ComponentLink1URL=https://datasheet.ciiva.com/7842/1776102-7842535.pdf, ComponentLink2Description=https://datasheet.ciiva.com/14589/70095383-14589479.pdf, ComponentLink2URL=https://datasheet.ciiva.com/14589/70095383-14589479.pdf, ComponentLink3Description=https://datasheet.ciiva.com/5411/kem-c1002-x7r-smd-5411498.pdf, ComponentLink3URL=https://datasheet.ciiva.com/5411/kem-c1002-x7r-smd-5411498.pdf, Contact Plating=Tin,Matte, Depth=1.25mm, Dissipation Factor=2.5%, Height=1mm, Lead Pitch=0.75mm, Length=2mm, Manufacturer Part Number=C0805C104K1RACTU, Mount="Surface Mount,PCB", Number of Pins=2, Packaging="Tape and Reel", Pricing 1="1=0.33, 10=0.226, 100=0.1147, 500=0.07848, 1000=0.06943 (USD)", Radiation Hardening=No, REACH SVHC="No SVHC", Stock 1=25000, Supplier 1=Digi-Key, Termination=SMD/SMT, Thickness=0.043inch, Voltage Rating=100V, Voltage Rating (DC)=100V, Width=1.2mm
C14 C15 C16 C17: library part GRM21BR61E106MA73L, "CAP CER 10UF 25V X5R 0805", Case Code (Imperial)=0805, Case Code (Metric)=2012, Dielectric=X5R, Manufacturer=Murata, Max Operating Temperature=85°C, Min Operating Temperature=-55°C, Package Quantity=3000, Supplier Part Number 1=490-10748-1-ND, Tolerance=20%, Voltage Rating=25V, Capacitance=10uF, Case/Package=0805, Composition=Ceramic, Depth=1.25mm, Height=1.25mm, Lead Free="Lead Free", Length=2mm, Manufacturer Part Number=GRM21BR61E106MA73L, Mount="Surface Mount", Packaging="Tape and Reel", Pricing 1="1=0.27, 10=0.184, 100=0.1044, 500=0.0737, 1000=0.06449 (USD)", REACH SVHC="No SVHC", Stock 1=30000, Supplier 1=Digi-Key, Termination=SMD/SMT, Thickness=0.055inch, Voltage Rating (DC)=25V, Weight=0.000335oz, Width=0.049inch
D1: "LED RED CLEAR CHIP SMD", Case Code (Imperial)=0805, Case Code (Metric)=2012, Color=Red, Forward Current=20mA, Forward Voltage=2V, Lens Color=Clear, Manufacturer=Kingbright, Max Operating Temperature=85°C, Min Operating Temperature=-40°C, Package Quantity=1, Power Rating=75mW, Supplier Part Number 1=754-1128-1-ND, Case/Package=0805, Category=LEDs, ComponentLink1Description=https://datasheet.ciiva.com/2113/apt2012ec-2113812.pdf?src-supplier=Digi-Key, ComponentLink1URL=https://datasheet.ciiva.com/2113/apt2012ec-2113812.pdf?src-supplier=Digi-Key, ComponentLink2Description=https://datasheet.ciiva.com/4688/apt2012ec-35230-4688685.pdf?src-supplier=Mouser, ComponentLink2URL=https://datasheet.ciiva.com/4688/apt2012ec-35230-4688685.pdf?src-supplier=Mouser, ComponentLink3Description=https://datasheet.ciiva.com/2113/apt2012ec-2113813.pdf?src-supplier=Digi-Key, ComponentLink3URL=https://datasheet.ciiva.com/2113/apt2012ec-2113813.pdf?src-supplier=Digi-Key, ComponentLink4Description=https://datasheet.ciiva.com/2113/apt2012ec-2113814.pdf?src-supplier=Digi-Key, ComponentLink4URL=https://datasheet.ciiva.com/2113/apt2012ec-2113814.pdf?src-supplier=Digi-Key, Dominant Wavelength=625nm, Height=0.75mm, Illumination Color=Red, Lead Free="Lead Free", Length=2mm, Lens Style=Clear,Flat, Luminous Intensity=12mcd, Manufacturer Part Number=APT2012EC, Mount="Surface Mount", Number of LEDs=1, Number of Pins=2, Packaging="Tape and Reel", Pricing 1="1=0.35000, 10=0.25700, 100=0.12150, 500=0.08100, 1000=0.06345 (USD)", RoHS=Yes, Stock 1=35644, Supplier 1=Digi-Key, Test Current=20mA, Viewing Angle=120°, Wavelength=625nm, Width=1.25mm
D2 D4: library part CMP-1055-00449-1, "Schottky Power Rectifier, 2-Pin SOD-123, Pb-Free, Tape and Reel", Manufacturer="On Semiconductor", ComponentLink1Description="Manufacturer URL", ComponentLink1URL=http://www.onsemi.com/, ComponentLink2Description=Datasheet, ComponentLink2URL=http://www.onsemi.cn/pub_link/Collateral/MBR120VLSFT1-D.PDF, ComponentLink3Description="Package Specification", ComponentLink3URL=http://www.onsemi.cn/pub_link/Collateral/MBR120VLSFT1-D.PDF, Configuration=Single, DatasheetVersion="Rev. 2", IFSM Max (A)=45, Mounting Technology="Surface Mount", PackageDescription="2-Pin SOD, Body 1.65 x 2.7 mm", PackageReference=SOD-123FL-2-498-01, PackageVersion="Rev. A", Packing="Tape and Reel", PartNumber=MBR120VLSFT1G, RoHS=TRUE
D3: library part CMP-18399-000005-1, "LED RGB DIFFUSED 6PLCC SMD", Colour="Red, Green, Blue", Forward Current=20mA, Forward Voltage=2.1/3.1/3.1V, Manufacturer=Broadcom, Max Junction Temp=+110°C, Package=PLCC-6, Power Dissipation=125/90/90mW, Reverse Voltage=4V, Temperature="-40°C to +100°C", Temperature Range High=+100°C, Temperature Range Low=-40°C, Automotive=No, Category=Diode, ComponentLink2Description=Datasheet, ComponentLink2URL=https://docs.broadcom.com/doc/AV02-3873EN, Device Class L1=Optoelectronics, Device Class L2=LEDs, Device Class L3=unset, Digikey Description="LED RGB DIFFUSED 6PLCC SMD", Height=2mm, Lead Free=Yes, Led Orientation="Top View", Luminous Intensity=650/1900/384mcd, Manufacturer Part Number=ASMT-YTD7-0AA02, Mouser Description="Standard LEDs - SMD PLCC6,T/MT SILICONE RGB", Octopart=https://octopart.com/asmt-ytd7-0aa02-broadcom-71127359, Peak Emmision Wavelength=630/522/465nm, RoHS=TRUE, Viewing Angle=120°, Wavelength=623/529/469nm
J1: "Conn Micro USB Type B RCP 5 POS 0.65mm Solder RA SMD 5 Terminal 1 Port Embossed T/R", Manufacturer=Molex, Max Operating Temperature=85°C, Max Voltage Rating (AC)=30V, Min Operating Temperature=-30°C, Package Quantity=1, Supplier Part Number 1=WM17141CT-ND, Category=Connector, ComponentLink1Description=https://datasheet.ciiva.com/6731/473460001-sd-6731041.pdf, ComponentLink1URL=https://datasheet.ciiva.com/6731/473460001-sd-6731041.pdf, ComponentLink2Description=https://datasheet.ciiva.com/16545/0473460001-io-connectors-16545778.pdf, ComponentLink2URL=https://datasheet.ciiva.com/16545/0473460001-io-connectors-16545778.pdf, ComponentLink3Description=https://datasheet.ciiva.com/3094/0473460001-io-connectors-3094381.pdf, ComponentLink3URL=https://datasheet.ciiva.com/3094/0473460001-io-connectors-3094381.pdf, Connector Type=USB, Contact Material="Copper Alloy", Contact Plating=Nickel,Gold, Depth=5.43mm, Gender=Receptacle, Housing Material=Polymer, Length=7.8mm, Manufacturer Part Number=0473460001, Mount="Surface Mount,Horizontal", Number of Contacts=5, Number of Ports=1, Number of Terminals=5, Orientation="Right Angle", Packaging="Tape and Reel", Pitch=0.65mm, Pricing 1="1=1, 10=0.877, 25=0.8252, 50=0.7906, 100=0.7563, 250=0.68752, 500=0.61876, 1000=0.55 (USD)", Radiation Hardening=No, Stock 1=27309, Supplier 1=Digi-Key, Termination=Solder
J2: "Connector Header, GH Series, 2 Position, 1.25mm, 30-26 AWG, 50V, Surface Mount, Right Angle, Solder, Locking Ramp", Color=Natural, Current Rating=1A, Manufacturer=JST, Supplier Part Number 1=455-1564-1-ND, Voltage Rating=50V, Category="Headers and Wire Housings", ComponentLink1Description=https://datasheet.ciiva.com/25617/0900766b810cef17-25617252.pdf?src-supplier=RSComponents, ComponentLink1URL=https://datasheet.ciiva.com/25617/0900766b810cef17-25617252.pdf?src-supplier=RSComponents, ComponentLink2Description=https://datasheet.ciiva.com/730/egh-730691.pdf?src-supplier=Digi-Key, ComponentLink2URL=https://datasheet.ciiva.com/730/egh-730691.pdf?src-supplier=Digi-Key, ComponentLink3Description=https://datasheet.ciiva.com/712/egh-712452.pdf?src-supplier=Digi-Key, ComponentLink3URL=https://datasheet.ciiva.com/712/egh-712452.pdf?src-supplier=Digi-Key, ComponentLink4Description=https://datasheet.ciiva.com/16345/jstsm02b-ghs-tb-lf-sn-16345351.pdf?src-supplier=Future+Electronics, ComponentLink4URL=https://datasheet.ciiva.com/16345/jstsm02b-ghs-tb-lf-sn-16345351.pdf?src-supplier=Future+Electronics, Connector Type="Outer Shroud Contact", Contact Material=Bronze, Contact Plating=Tin, Fastening Type=Ramp, Housing Color=Natural, Housing Material=Nylon, Lead Free="Lead Free", Manufacturer Part Number=SM02B-GHS-TB(LF)(SN), Mount="Surface Mount", Number of Contacts=2, Number of Positions=2, Number of Rows=1, Orientation="Right Angle", Packaging="Tape and Reel", Pitch=0.049inch, Pricing 1="1=0.46000, 10=0.43800, 100=0.30670, 500=0.26292, 1000=0.21910 (USD)", RoHS=Yes, Stock 1=14162, Supplier 1=Digi-Key, Termination=Solder
J3: library part CMP-1676-00003-1, "MCRF, PCB Vertical Jack Receptacle, 50 Ohm, 4-Pin SMD, RoHS, Tape and Reel", Frequency="6 Hz", Max Operating Temperature="90 degC", Min Operating Temperature="-40 degC", Package Quantity=5000, Voltage Rating="60 V", ComponentLink1Description="Manufacturer URL", ComponentLink1URL=http://www.molex.com/, ComponentLink2Description=Datasheet, ComponentLink2URL=http://www.molex.com/webdocs/datasheets/pdf/en-us/0734120110_RF_COAX_CONNECTORS.pdf, ComponentLink3Description="Package Specification", ComponentLink3URL=http://www.molex.com/pdm_docs/sd/734120110_sd.pdf, Contact Material=Bronze, Contact Plating=Gold, DatasheetVersion=04/2016, Gender=Female, Height="1.25 mm", Impedance="50 Ohm", Length="3 mm", Mating Cycles=30, Mount="Surface Mount", Mounting Technology="Surface Mount", PackageDescription="4-Leads SMD, Body 2.6 x 2.6 mm", PackageReference=73412-0110, PackageVersion="Rev. C14, 07/2015", Packaging="Tape and Reel", Radiation Hardening=No, REACH SVHC=Unknown, RoHSCompliant=true, Voltage Rating (AC)="60 V", Width="3 mm"
J4 J5 J6 J7 J16 J17: library part SM04B-GHS-TB(LF)(SN)-, "JST-GH CONN HEADER SMD R/A 4 POS 1.25MM", Color=Natural, Manufacturer=JST, Supplier Part Number 1=455-1566-1-ND, Category=Connectors, ComponentLink1Description=https://datasheet.ciiva.com/6832/egh-6832463.pdf?src-supplier=Digi-Key, ComponentLink1URL=https://datasheet.ciiva.com/6832/egh-6832463.pdf?src-supplier=Digi-Key, Connector Type="Outer Shroud Contact", Contact Plating=Tin, Fastening Type=Ramp, Manufacturer Part Number=SM04B-GHS-TB(LF)(SN)-, Mount="Surface Mount", Number of Positions=4, Number of Rows=1, Packaging="Cut Tape", Pitch=0.049inch, Pricing 1="1=0.45000, 10=0.42300, 100=0.32440, 500=0.28212, 1000=0.23274 (USD)", RoHS=Yes, Stock 1=34258, Supplier 1=Digi-Key, Termination=Solder
J8 J9 J10 J11: "JST (JAPAN SOLDERLESS TERMINALS) - SM03B-GHS-TB (LF)(SN) - MACHO, 1,25 MM, 3 VÍAS, SMT, 90 GRADOS", Color=Natural, Current Rating=1A, Manufacturer=JST, Max Operating Temperature=85°C, Min Operating Temperature=-25°C, Supplier Part Number 1=455-1565-1-ND, Voltage Rating=50V, Category="Headers and Wire Housings", ComponentLink1Description=https://datasheet.ciiva.com/25617/0900766b810cef18-25617270.pdf?src-supplier=RSComponents, ComponentLink1URL=https://datasheet.ciiva.com/25617/0900766b810cef18-25617270.pdf?src-supplier=RSComponents, ComponentLink2Description=https://datasheet.ciiva.com/16379/jstsm03b-ghs-tb-lf-sn-16379590.pdf?src-supplier=Future+Electronics, ComponentLink2URL=https://datasheet.ciiva.com/16379/jstsm03b-ghs-tb-lf-sn-16379590.pdf?src-supplier=Future+Electronics, ComponentLink3Description=https://datasheet.ciiva.com/8052/5438-8052261.pdf?src-supplier=Element14, ComponentLink3URL=https://datasheet.ciiva.com/8052/5438-8052261.pdf?src-supplier=Element14, Connector Type="Outer Shroud Contact", Contact Material=Bronze, Contact Plating=Tin, Fastening Type=Ramp, Gender=Male, Housing Color=Natural, Housing Material=Nylon, Lead Free="Lead Free", Manufacturer Part Number=SM03B-GHS-TB(LF)(SN), Mount="Surface Mount", Number of Contacts=3, Number of Positions=3, Number of Rows=1, Orientation="Right Angle", Packaging="Tape and Reel", Pitch=0.049inch, Pricing 1="1=0.49000, 10=0.46500, 100=0.32580, 500=0.27924, 1000=0.23270 (USD)", REACH SVHC="No SVHC", RoHS=Yes, Stock 1=8954, Supplier 1=Digi-Key, Termination=Solder, Voltage Rating (AC)=50V, Wire/Cable Gauge=26AWG
LS1: "AUDIO PIEZO TRANSDUCER 25V SMD", Case/Package=SMD/SMT, Frequency=4kHz, Manufacturer=CUI, Max Operating Temperature=120°C, Min Operating Temperature=-40°C, Operating Supply Current=5mA, Package Quantity=1000, Supplier Part Number 1=102-2197-1-ND, Voltage Rating=5V, Category="Audio Products", ComponentLink1Description=http://www.mouser.com/ds/2/670/cmt-1203-smt-515906.pdf?src-supplier=Mouser, ComponentLink1URL=http://www.mouser.com/ds/2/670/cmt-1203-smt-515906.pdf?src-supplier=Mouser, ComponentLink2Description=https://www.cui.com/product/resource/digikeypdf/cmt-1203-smt.pdf?src-supplier=Digi-Key, ComponentLink2URL=https://www.cui.com/product/resource/digikeypdf/cmt-1203-smt.pdf?src-supplier=Digi-Key, Height=3.3mm, Lead Free="Lead Free", Length=12mm, Manufacturer Part Number=CMT-1203-SMT-TR, Mount="Surface Mount", Packaging="Tape and Reel", Pricing 1="1=1.99000, 10=1.64900, 25=1.52400, 50=1.43320, 100=1.34560, 500=1.15502 (USD)", RoHS=Yes, Stock 1=22304, Supplier 1=Digi-Key, Termination=Solder, Width=12mm
Q1 Q3 Q4: "MOSFET N-CH 50V 220MA SOT-23", Case/Package=SOT-23, Continuous Drain Current (ID)=220mA, Drain to Source Breakdown Voltage=50V, Drain to Source Resistance=3.5R, Gate to Source Voltage (Vgs)=20V, Input Capacitance=27pF, Manufacturer="ON Semiconductor / Fairchild", Max Operating Temperature=150°C, Max Power Dissipation=360mW, Min Operating Temperature=-55°C, On-State Resistance=6R, Package Quantity=1, Supplier Part Number 1=BSS138CT-ND, Threshold Voltage=1.3V, Category=Transistor, ComponentLink1Description=https://datasheet.ciiva.com/931/bss138-931776.pdf, ComponentLink1URL=https://datasheet.ciiva.com/931/bss138-931776.pdf, ComponentLink2Description=https://datasheet.ciiva.com/1190/193736-1190130.pdf, ComponentLink2URL=https://datasheet.ciiva.com/1190/193736-1190130.pdf, ComponentLink3Description=https://datasheet.ciiva.com/1190/193736-1190131.pdf, ComponentLink3URL=https://datasheet.ciiva.com/1190/193736-1190131.pdf, ComponentLink4Description=https://datasheet.ciiva.com/1254/193736-1254983.pdf, ComponentLink4URL=https://datasheet.ciiva.com/1254/193736-1254983.pdf, ComponentLink5Description=https://datasheet.ciiva.com/3304/bss138-3304423.pdf, ComponentLink5URL=https://datasheet.ciiva.com/3304/bss138-3304423.pdf, ComponentLink6Description=https://datasheet.ciiva.com/3304/bss138-3304424.pdf, ComponentLink6URL=https://datasheet.ciiva.com/3304/bss138-3304424.pdf, ComponentLink7Description=https://datasheet.ciiva.com/22655/193736-22655240.pdf, ComponentLink7URL=https://datasheet.ciiva.com/22655/193736-22655240.pdf, ComponentLink8Description=https://datasheet.ciiva.com/16834/bss138-16834843.pdf, ComponentLink8URL=https://datasheet.ciiva.com/16834/bss138-16834843.pdf, ComponentLink9Description=https://datasheet.ciiva.com/27050/784896-27050043.pdf, ComponentLink9URL=https://datasheet.ciiva.com/27050/784896-27050043.pdf, ComponentLink10Description=https://datasheet.ciiva.com/26229/bss138-26229007.pdf, ComponentLink10URL=https://datasheet.ciiva.com/26229/bss138-26229007.pdf, Contact Plating=Tin,Matte, Current Rating=220mA, Drain to Source Voltage (Vdss)=50V, Dual Supply Voltage=50V, Element Configuration=Single, Fall Time=9ns, Height=0.93mm, Lead Free="Lead Free", Length=2.92mm, Manufacturer Part Number=BSS138, Mount="Surface Mount", Nominal Vgs=1.3V, Number of Elements=1, Number of Pins=3, Packaging="Tape and Reel", Power Dissipation=360mW, Pricing 1="1=0.32, 10=0.292, 100=0.1633, 500=0.0875, 1000=0.0595 (USD)", Radiation Hardening=No, Rds On Max=3.5R, REACH SVHC="No SVHC", Rise Time=9ns, Stock 1=1717197, Supplier 1=Digi-Key, Termination=SMD/SMT, Turn-Off Delay Time=20ns, Turn-On Delay Time=2.5ns, Voltage Rating (DC)=50V, Weight=0.03g, Width=1.3mm
Q2: "MOSFET N-CH 20V 4.2A SOT23", Case/Package=SOT-23, Continuous Drain Current (ID)=3A, Drain to Source Voltage (Vdss)=20V, Gate to Source Voltage (Vgs)=8V, Input Capacitance=436pF, Manufacturer="Alpha & Omega Semiconductor", Max Operating Temperature=150°C, Max Power Dissipation=1.4W, Min Operating Temperature=-55°C, Supplier Part Number 1=785-1009-1-ND, ComponentLink1Description=http://aosmd.com/res/packaging_information/SOT-23-3L.pdf, ComponentLink1URL=http://aosmd.com/res/packaging_information/SOT-23-3L.pdf, ComponentLink2Description=https://www.verical.com/server-webapp/html/getDatasheet?partID=64433, ComponentLink2URL=https://www.verical.com/server-webapp/html/getDatasheet?partID=64433, Lead Free="Lead Free", Manufacturer Part Number=AO3414, Mount="Surface Mount", Number of Elements=1, Number of Pins=3, Packaging="Tape and Reel", Power Dissipation=1.4W, Pricing 1="1=0.5, 10=0.357, 100=0.2102, 500=0.11896, 1000=0.09121 (USD)", Radiation Hardening=No, Rds On Max=50mR, Stock 1=451497, Supplier 1=Digi-Key
R1 R2 R12: library part ERJ-P06F1002V, "RES SMD 10kOHM 1% 1/2W 0805", Case Code (Imperial)=0805, Case Code (Metric)=2012, Manufacturer=Panasonic, Max Operating Temperature=155°C, Min Operating Temperature=-55°C, Package Quantity=5000, Power Rating=500mW, Supplier Part Number 1=P16059CT-ND, Temperature Coefficient=100ppm/°C, Tolerance=1%, Voltage Rating=150V, Case/Package=0805, Category="Chip SMD Resistors", ComponentLink1Description=https://datasheet.ciiva.com/11811/0900766b812cb812-11811124.pdf?src-supplier=RSComponents, ComponentLink1URL=https://datasheet.ciiva.com/11811/0900766b812cb812-11811124.pdf?src-supplier=RSComponents, ComponentLink2Description=https://datasheet.ciiva.com/24069/aoa0000ce4-64075-24069191.pdf?src-supplier=Mouser, ComponentLink2URL=https://datasheet.ciiva.com/24069/aoa0000ce4-64075-24069191.pdf?src-supplier=Mouser, ComponentLink3Description=https://datasheet.ciiva.com/48426/erjp-series-eng-tds-48426779.pdf?src-supplier=Distrelec, ComponentLink3URL=https://datasheet.ciiva.com/48426/erjp-series-eng-tds-48426779.pdf?src-supplier=Distrelec, Composition="Thick Film", Contact Plating=Tin, Depth=1.25mm, Height=0.6mm, Lead Free="Lead Free", Length=2mm, Manufacturer Part Number=ERJ-P06F1002V, Military Standard=Not, Mount="Surface Mount", Packaging="Tape and Reel", Pricing 1="1=0.17000, 10=0.14800, 100=0.05770, 1000=0.02416, 2500=0.02214 (USD)", Radiation Hardening=No, REACH SVHC="No SVHC", Resistance=10kR, RoHS=Yes, Stock 1=119213, Supplier 1=Digi-Key, Termination=SMD/SMT, Voltage Rating (DC)=150V, Width=1.2mm
R3 R4 R5 R7 R8 R9 R10 R11: library part ERJ-P06J101V, "RES SMD 100 OHM 5% 1/2W 0805", Case Code (Imperial)=0805, Case Code (Metric)=2012, Manufacturer=Panasonic, Max Operating Temperature=155°C, Max Power Dissipation=500mW, Min Operating Temperature=-55°C, Package Quantity=1, Supplier Part Number 1=P100ADCT-ND, Temperature Coefficient=200ppm/°C, Tolerance=5%, Voltage Rating=400V, Voltage Rating (DC)=150V, Case/Package=0805, Category="Chip SMD Resistors", ComponentLink1Description=https://datasheet.ciiva.com/11810/0900766b812cb812-11810156.pdf?src-supplier=RSComponents, ComponentLink1URL=https://datasheet.ciiva.com/11810/0900766b812cb812-11810156.pdf?src-supplier=RSComponents, ComponentLink2Description=https://datasheet.ciiva.com/16788/70068906-16788678.pdf?src-supplier=Allied+Electronics, ComponentLink2URL=https://datasheet.ciiva.com/16788/70068906-16788678.pdf?src-supplier=Allied+Electronics, ComponentLink3Description=https://datasheet.ciiva.com/7831/aoa0000ce4-7831000.pdf?src-supplier=Element14, ComponentLink3URL=https://datasheet.ciiva.com/7831/aoa0000ce4-7831000.pdf?src-supplier=Element14, ComponentLink4Description=https://datasheet.ciiva.com/16767/70068906-16767564.pdf?src-supplier=Allied+Electronics, ComponentLink4URL=https://datasheet.ciiva.com/16767/70068906-16767564.pdf?src-supplier=Allied+Electronics, ComponentLink5Description=https://datasheet.ciiva.com/9186/aoa0000ce4-9186844.pdf?src-supplier=Avnet, ComponentLink5URL=https://datasheet.ciiva.com/9186/aoa0000ce4-9186844.pdf?src-supplier=Avnet, ComponentLink6Description=https://datasheet.ciiva.com/24163/aoa0000ce4-64075-24163318.pdf?src-supplier=Mouser, ComponentLink6URL=https://datasheet.ciiva.com/24163/aoa0000ce4-64075-24163318.pdf?src-supplier=Mouser, ComponentLink7Description=https://datasheet.ciiva.com/17208/aoa0000ce4-17208010.pdf?src-supplier=Avnet+Europe, ComponentLink7URL=https://datasheet.ciiva.com/17208/aoa0000ce4-17208010.pdf?src-supplier=Avnet+Europe, Composition="Thick Film", Contact Plating=Tin, Depth=1.25mm, Features="Automotive AEC-Q200", Height=0.6mm, Lead Free="Lead Free", Length=2mm, Manufacturer Part Number=ERJ-P06J101V, Military Standard=Not, Mount="Surface Mount", Number of Terminations=2, Packaging="Tape and Reel", Power Rating=500mW, Pricing 1="1=0.11000, 10=0.10300, 100=0.03960, 1000=0.01742, 2500=0.01505 (USD)", REACH SVHC=Unknown, Resistance=100R, RoHS=Yes, Stock 1=141947, Supplier 1=Digi-Key, Termination=SMD/SMT, Weight=0.000194oz, Width=1.2mm
R6 R13 R14 R15: library part ERJ-P06J105V, "Res Thick Film 0805 1M Ohm 5% 1/4W 200ppm/C Molded SMD SMD Punched Carrier T/R", Case Code (Imperial)=0805, Case Code (Metric)=2012, Manufacturer=Panasonic, Max Operating Temperature=155°C, Max Power Dissipation=500mW, Min Operating Temperature=-55°C, Package Quantity=1, Supplier Part Number 1=P1.0MADCT-ND, Temperature Coefficient=200ppm/°C, Tolerance=5%, Voltage Rating=400V, Voltage Rating (DC)=150V, Case/Package=0805, Category="Chip SMD Resistors", ComponentLink1Description=https://datasheet.ciiva.com/11815/0900766b812cb812-11815881.pdf?src-supplier=RSComponents, ComponentLink1URL=https://datasheet.ciiva.com/11815/0900766b812cb812-11815881.pdf?src-supplier=RSComponents, ComponentLink2Description=https://datasheet.ciiva.com/16781/70068906-16781958.pdf?src-supplier=Allied+Electronics, ComponentLink2URL=https://datasheet.ciiva.com/16781/70068906-16781958.pdf?src-supplier=Allied+Electronics, ComponentLink3Description=https://datasheet.ciiva.com/16782/70068906-16782920.pdf?src-supplier=Allied+Electronics, ComponentLink3URL=https://datasheet.ciiva.com/16782/70068906-16782920.pdf?src-supplier=Allied+Electronics, ComponentLink4Description=https://datasheet.ciiva.com/16785/70068906-16785434.pdf?src-supplier=Allied+Electronics, ComponentLink4URL=https://datasheet.ciiva.com/16785/70068906-16785434.pdf?src-supplier=Allied+Electronics, ComponentLink5Description=https://datasheet.ciiva.com/7909/1913273-7909563.pdf?src-supplier=Element14, ComponentLink5URL=https://datasheet.ciiva.com/7909/1913273-7909563.pdf?src-supplier=Element14, ComponentLink6Description=https://datasheet.ciiva.com/24044/aoa0000ce4-64075-24044221.pdf?src-supplier=Mouser, ComponentLink6URL=https://datasheet.ciiva.com/24044/aoa0000ce4-64075-24044221.pdf?src-supplier=Mouser, ComponentLink7Description=https://datasheet.ciiva.com/17215/aoa0000ce4-17215262.pdf?src-supplier=Avnet+Europe, ComponentLink7URL=https://datasheet.ciiva.com/17215/aoa0000ce4-17215262.pdf?src-supplier=Avnet+Europe, Composition="Thick Film", Contact Plating=Tin, Depth=1.25mm, Features="Automotive AEC-Q200", Height=0.6mm, Lead Free="Lead Free", Length=2mm, Manufacturer Part Number=ERJ-P06J105V, Military Standard=Not, Mount="Surface Mount", Number of Terminations=2, Packaging="Tape and Reel", Power Rating=500mW, Pricing 1="1=0.11000, 10=0.10300, 100=0.03960, 1000=0.01742, 2500=0.01505 (USD)", Radiation Hardening=No, REACH SVHC=Unknown, Resistance=1MR, RoHS=Yes, Stock 1=44455, Supplier 1=Digi-Key, Termination=SMD/SMT, Width=0.049inch
SD1: library part CMP-2000-05825-1, "Micro SD Card, RA, -25 to 85 degC, 8-Pin SMD, RoHS, Tape and Reel", Current Rating=500mA, Manufacturer=Molex, Package Description="8-Pin Surface Mount Device, Body 11.95 x 11.4 mm, Pitch 1.1 mm", Voltage Rating=10VAC/DC, Brand=Molex, Card Type=microSD, Contact Material=PhosphorBronze, Contact Plating=Gold, Datasheet URL=http://www.molex.com/pdm_docs/sd/1040310811_sd.pdf, Datasheet Version="Rev. E, 04/2006", Height=1.42mm, Housing Material=LiquidCrystalPolymer(LCP), Insertion - Extraction Style=Push-Pull, Length=11.4mm, Manufacturer URL=http://www.molex.com/, Mating Cycles=10000, Mounting Technology=SurfaceMount, Mounting Type=Standard, Number of Contacts=8, Number of Rows=1Row, Orientation=RightAngle, Package Reference=104031-0811, Packaging=Reel, Pitch=1.1mm, Product=CardConnectors, Product Category=MemoryCardConnectors, RoHS=True, Series=104031, Termination Style=SMD
SW1: "SWITCH SLIDE SPDT 0.4VA 28V", Case/Package=SMD/SMT, Manufacturer="NKK Switches", Max Current Rating=100mA, Max Operating Temperature=85°C, Max Voltage Rating (AC)=28V, Min Operating Temperature=-25°C, Package Quantity=500, Supplier Part Number 1=360-2924-1-ND, Actuator Length=2mm, Actuator Material=Polyphenylene, Actuator Type=Standard, ComponentLink1Description=http://www.farnell.com/datasheets/1783587.pdf?src-supplier=Element14, ComponentLink1URL=http://www.farnell.com/datasheets/1783587.pdf?src-supplier=Element14, Contact Material=Bronze, Contact Plating=Gold,Silver, Depth=7.45mm, Electrical Life=10000Cycles, Housing Material=Bronze, Lead Free="Lead Free", Length=10.5mm, Manufacturer Part Number=SS312SAH4-R, Max Voltage Rating (DC)=28V, Mechanical Life=10000Cycles, Mount="Surface Mount", Orientation="Right Angle", Packaging="Tape and Reel", Pricing 1="1 = 3.33000, 10 = 3.18800, 25 = 3.04920, 50 = 2.70280, 100 = 2.63340, 250 = 2.59876 (USD)", REACH SVHC="No SVHC", RoHS=Yes, Stock 1=6697, Supplier 1=Digi-Key, Switch Function=On-On, Switch Travel=2mm, Termination="Gull Wing", Throw Configuration=SPDT, Voltage Rating (AC)=28V, Voltage Rating (DC)=28V
SW2: "SWITCH TACTILE SPST-NO 0.05A 12V", Manufacturer=E-Switch, Max Operating Temperature=70°C, Min Operating Temperature=-20°C, Operating Force=180gf, Supplier Part Number 1=EG5384CT-ND, Illumination Type=Non-Illuminated, Lead Free="Lead Free", Manufacturer Part Number=TL3365AF180QG, Mechanical Life=100000Cycles, Mount="Surface Mount", Packaging="Tape and Reel", Pricing 1="1=0.34, 10=0.333, 25=0.3208, 50=0.3088, 100=0.297, 250=0.27324, 500=0.2376, 1000=0.20196 (USD)", Stock 1=55347, Supplier 1=Digi-Key, Switch Function=Off-Mom, Switch Travel=0.2mm, Termination="Gull Wing", Throw Configuration=SPST